# EAGLE board KGM EEPROM v1.1 (EAGLE 6.1)
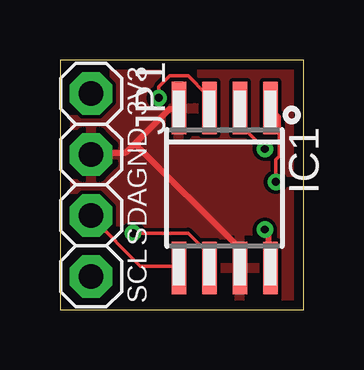
[diagram p0: board, top side]
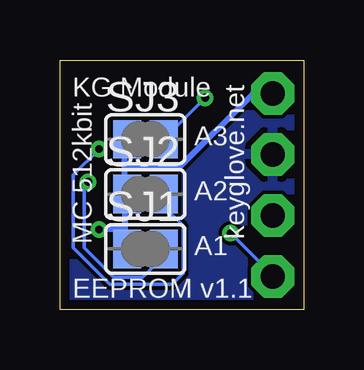
[diagram p1: board, bottom side, seen from below]

Size 10.16 x 10.41 mm. Coordinates in mm from the lower left corner, seen from the top.
Outline: 0,0 10.16,0 10.16,10.41 0,10.41 0,0
Copper layers (1*16): Top 0.0356mm / dielectric 1.5011mm / Bottom 0.0356mm
Design rules: minimum track width 6mil, minimum drill 13mil, track to track 6mil, track to pad 6mil, pad to pad 6mil, via to via 6mil, smd to smd 6mil, copper to edge 15mil, drill to drill 6mil, minimum pad ring 7mil, minimum via ring 7mil, stop-mask expansion 4mil, vias tented up to drill 20mil, thermal gap 10mil
Net classes: 0 default: width 0.152 mm, drill 0.305 mm, clearance 0.152 mm; 1 power: width 0.254 mm, drill 0.305 mm, clearance 0.152 mm

## Footprints (pad centres in the part's own frame; a part is rotated, then mirrored left to right if it is on the bottom)
SO-08M = smd 0.6 x 2.2: 1 -1.905,-3.33; 2 -0.635,-3.33; 3 0.635,-3.33; 4 1.905,-3.33; 5 1.905,3.33; 6 0.635,3.33; 7 -0.635,3.33; 8 -1.905,3.33
1X04 = drill 1.016 pad 1.778 octagon: 1 -3.81,0; 2 -1.27,0; 3 1.27,0; 4 3.81,0
SJ = smd 1.168 x 1.6: 1 -0.762,0; 2 0.762,0

## Placement (x,y rotation side)
IC1  24LC512SM  [SO-08M]  6.86,5.08 180 top
JP1  CONN  [1X04]  1.3,5.21 270 top
SJ1  A0  [SJ]  6.6,2.54 0 bottom
SJ2  A1  [SJ]  6.6,4.83 0 bottom
SJ3  A2  [SJ]  6.6,7.11 0 bottom

## Library data of the parts
IC1 = microchip; MF: MICROCHIP; MPN: 24LC128-I/SM; OC_FARNELL: 9757937; OC_NEWARK: 92C7134
JP1 = sf-pinhead
SJ1-SJ3 = jumper

## Nets
GND [power]: IC1.4 IC1.7 JP1.2
N$5: IC1.1 SJ1.2
N$6: IC1.2 SJ2.2
N$7: IC1.3 SJ3.2
SCL: IC1.6 JP1.4
SDA: IC1.5 JP1.3
VCC [power]: IC1.8 JP1.1 SJ1.1 SJ2.1 SJ3.1

## Tracks (layer width: path | path; a pad name or v marks a point on that pad's centre or on a via)
GND
  Top 0.254: 3.12,6.93 2.74,6.55 1.37,6.55 JP1.2 | 3.12,6.93 4.57,8.38 4.88,8.38 IC1.4 | 3.12,6.93 7.47,2.59 7.47,1.83 IC1.7
  pour Bottom: 0.25,10.16 10.16,10.16 10.16,0.25 0.25,0.25
  pour Top: 0.25,10.16 10.16,10.16 10.16,0.25 0.25,0.25
N$5  (via drill 0.33)
  Top 0.152: v8.99,5.33 8.99,6.25 9.14,6.4 9.14,8.08 8.84,8.38 IC1.1
  Bottom 0.152: v8.99,5.33 9.14,5.18 9.14,2.59 7.92,1.37 6.71,1.37 5.94,2.13 5.94,2.44 SJ1.2
N$6  (via drill 0.33)
  Top 0.152: v8.53,6.71 7.62,7.62 7.62,8.38 IC1.2
  Bottom 0.152: v8.53,6.71 9.6,5.64 9.6,2.59 8.08,1.07 5.49,1.07 5.03,1.52 5.03,3.5 5.79,4.27 5.79,4.72 SJ2.2
N$7  (via drill 0.33)
  Top 0.152: v4.12,8.84 4.12,9.3 4.57,9.75 5.33,9.75 6.1,8.99 6.1,8.53 IC1.3
  Bottom 0.152: v4.12,8.84 SJ3.2
SCL  (via drill 0.33)
  Top 0.152: v3.05,3.2 5.33,3.2 6.1,2.44 6.1,1.83 IC1.6
  Bottom 0.152: v3.05,3.2 1.37,1.52 JP1.4
SDA
  Top 0.152: IC1.5 4.88,1.83 3.35,1.83 1.37,3.81 JP1.3
VCC  (via drill 0.33)
  Top 0.254: v8.53,3.35 8.69,3.2 8.69,1.83 IC1.8
  Bottom 0.254: 7.47,3.35 7.47,4.72 SJ2.1 7.47,4.88 7.47,5.94 | 7.47,3.35 7.47,2.59 SJ1.1 | 7.47,5.94 7.47,7.01 SJ3.1 | 7.47,3.35 v8.53,3.35 | 7.47,5.94 5.18,5.94 2.13,8.99 1.37,8.99 JP1.1

## Text on the board
tPlace: 3V3 | GND | SDA | SCL
bPlace: keyglove.net | KG Module | MC 512kbit | A3 | A2 | A1 | EEPROM v1.1